# Altium PCB OpenHeat.PcbDoc (part 2 of 2)
Units mm, origin at the board's own origin, x right, y up, seen from the top; angles counter-clockwise.
Board outline 51.05 x 26.04 mm, 2 copper layers (Top1, Bottom4), stack 1.271 mm thick; 76 components, 78 nets, 393 pads, 281 vias.
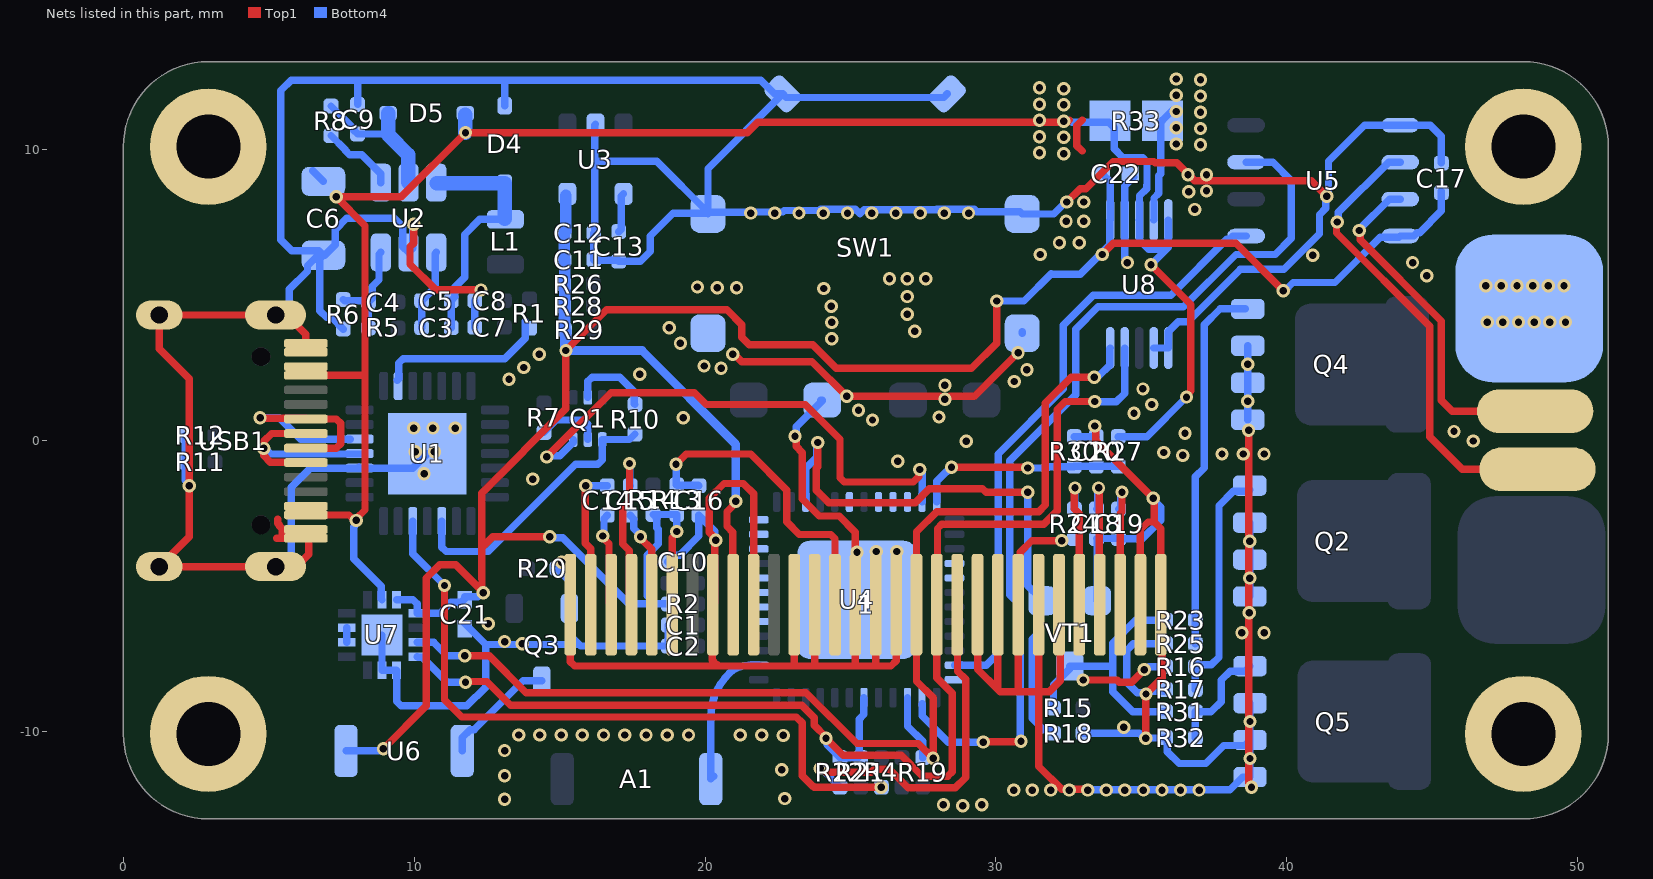
[diagram p2: the nets of this part, all layers, seen from the top]

## Via types
v1: diameter 0.457, hole 0.254, Top1 to Bottom4, tented both sides, 279 vias
v2: diameter 1.6, hole 1.6, Top1 to Bottom4, 2 vias

## Nets (pads, with @x,y where several pads share a name; then routed paths per layer and width w, separated by ;. In a path a pad name is that pad's centre, name@x,y a point inside that pad or via, vN(x,y) a via of type N, cw(c..) or ccw(c..) an arc to the next point about the centre after c; other vN are vias at no path point) (continued)
GND: 1.1 1.8 1.10 1.12 1.13 1.15 1.16 1.17 1.21 1.22 1.23 1.24 1.25 1.29 1.30 C1.1 C2.1 C6.1 C7.1 C8.1 C9.1 C10.2 C11.1 C12.1 C13.1 C16.1 C17.2 C18.2 C19.2 C20.1 C21.1 C22.1 D4.1 pad.@2.921,10.097 pad.@2.921,-10.096 pad.@48.133,10.097 pad.@48.133,-10.096 Q2.S Q3.2 Q4.S Q5.S R6.1 R11.1 R12.2 R17.2 R18.2 R20.1 R24.1 R25.2 R30.2 R32.2 SW1.3 SW1.5 U1.3 U1.29 U2.2 U3.2 U4.49 U5.1 U7.8 U7.9 U7.15 U8.1 U8.2 U8.7 USB1.1 USB1.2 USB1.3 USB1.4 USB1.A1 USB1.A12 USB1.B1 USB1.B12 VT1.2 | length 303.6
  Top1 w0.254: USB1.1@1.234,-4.343 USB1.1@1.332,-4.343 ; 5.266,-3.374 5.351,-3.374 5.357,-3.367 5.436,-3.367 ; 5.309,-2.705 5.309,-2.853 5.359,-2.904 5.359,-2.937 5.467,-3.044 5.467,-3.337 5.436,-3.367 ; USB1.B12@6.274,3.033 USB1.A1@6.274,3.333 6.274,3.645 5.611,4.307 USB1.3@5.234,4.307 USB1.2@1.234,4.307 1.234,3.148 2.261,2.121 v1(2.261,-1.562) 2.261,-3.316 1.677,-3.9 1.677,-3.998 USB1.1@1.332,-4.343 ; v1(9.982,7.429) 9.982,6.78 9.855,6.653 9.855,6.058 10.744,5.169 v1(12.294,5.169) ; 1.1@15.367,-5.651 15.367,-7.611 15.516,-7.76 20.472,-7.76 ; v1(20.955,2.959) 21.01,2.959 21.264,2.705 23.673,2.705 v1(24.867,1.511) 28.088,1.511 28.151,1.449 28.19,1.449 28.245,1.504 28.3,1.449 28.339,1.449 28.401,1.511 29.261,1.511 v1(30.759,3.01) ; 1.10@21.667,-5.651 21.667,-1.844 21.309,-1.486 20.648,-1.486 20.142,-1.992 20.142,-3.158 20.371,-3.387 v1(20.371,-3.442) 20.332,-3.481 20.332,-5.587 1.8@20.267,-5.651 20.244,-5.675 20.244,-7.56 20.393,-7.709 20.422,-7.709 20.472,-7.76 ; 1.12@23.067,-5.651 23.067,-7.731 23.038,-7.76 ; v1(23.089,0.14) 23.127,0.101 23.127,-0.211 23.343,-0.426 23.343,-2.019 23.927,-2.603 24.613,-2.603 25.167,-3.158 1.15@25.167,-5.651 25.167,-7.755 25.171,-7.76 ; 1.13@23.767,-5.651 23.767,-7.752 23.774,-7.76 ; 1.16@25.867,-5.651 25.867,-7.674 25.781,-7.76 ; 1.17@26.567,-5.651 26.568,-5.653 26.568,-7.582 26.391,-7.76 25.781,-7.76 ; 1.21@29.367,-5.651 29.367,-7.866 30.067,-8.566 ; 1.22@30.067,-5.651 30.067,-8.566 ; 1.24@31.467,-5.651 31.467,-8.645 31.471,-8.649 ; 1.25@32.167,-5.651 32.207,-5.692 32.207,-8.268 31.826,-8.649 31.471,-8.649 ; v1(32.258,-3.448) 31.241,-3.448 30.84,-3.848 30.84,-5.579 1.23@30.767,-5.651 30.767,-8.641 30.759,-8.649 ; v1(32.436,8.191) 32.893,8.649 33.096,8.649 34.032,9.585 35.43,9.585 35.469,9.546 36.212,9.546 36.83,8.928 40.843,8.928 v1(41.377,8.395) ; v1@33.16,-12.014 33.147,-12.002 32.258,-12.002 31.471,-11.214 31.471,-8.649 ; v1(33.395,0.492) 33.434,0.453 33.434,-0.02 35.446,-2.033 35.446,-2.8 35.437,-2.81 ; 1.29@34.967,-5.651 34.967,-3.07 35.226,-2.81 35.437,-2.81 ; v1(35.154,-10.249) v1(35.154,-10.249) 35.155,-8.725 v1(35.157,-8.723) ; v1@35.157,-8.674 35.203,-8.674 35.712,-8.165 35.712,-5.697 1.30@35.667,-5.651 35.662,-5.646 35.662,-3.035 35.437,-2.81 ; v1(38.684,0.343) 38.684,-11.769 38.786,-11.87 v1(38.786,-11.925) ; USB1.1@1.332,-4.343 USB1.4@5.234,-4.343 5.957,-4.343 6.375,-3.924 6.375,-3.39 6.352,-3.367 USB1.A12@6.274,-3.367 5.436,-3.367 ; 20.472,-7.76 23.038,-7.76 ; 23.038,-7.76 23.774,-7.76 ; 23.774,-7.76 25.171,-7.76 ; 25.171,-7.76 25.781,-7.76 ; 30.067,-8.566 30.15,-8.649 30.759,-8.649 ; 30.759,-8.649 31.471,-8.649
  Bottom4 w0.254: v1@2.134,-1.38 R11.1@2.134,-0.749 R12.2@2.134,0.165 ; USB1.3@5.234,4.307 5.359,4.307 5.704,4.652 5.704,5.189 6.331,5.816 6.331,5.999 6.695,6.363 C6.1@6.878,6.363 ; USB1.4@5.486,-4.09 USB1.4@5.234,-4.343 5.421,-4.343 5.766,-3.998 5.766,-1.613 6.422,-0.957 U1.3@8.064,-0.957 ; R6.1@7.561,3.823 7.154,4.229 6.985,4.229 6.756,4.458 6.756,6.241 C6.1@6.878,6.363 ; C9.1@8.052,11.544 8.052,12.382 ; U1.3@8.09,-0.932 U1.3@8.064,-0.957 ; U7.15@8.89,-6.693 U7.9@8.89,-7.908 U7.8@9.39,-7.908 9.398,-7.916 9.398,-8.983 9.547,-9.131 11.81,-9.131 12.455,-8.486 12.455,-7.023 ; v1(9.982,7.429) 9.943,7.391 9.943,6.597 U2.2@9.804,6.458 9.611,6.651 9.611,7.343 9.322,7.633 7.671,7.633 7.282,7.244 7.282,6.726 6.918,6.363 C6.1@6.878,6.363 ; U1.29@10.447,-0.457 9.947,-0.957 U1.3@8.123,-0.957 U1.3@8.064,-0.957 ; C21.1@11.709,-6.278 12.455,-7.023 ; C7.1@12.083,3.886 C8.1@12.083,4.8 ; D4.1@13.106,11.502 13.106,12.383 ; R20.1@14.91,-4.407 15.316,-4.813 15.316,-5.758 Q3.2@15.337,-5.779 15.342,-5.784 15.342,-6.693 15.672,-7.023 ; U3.2@16.231,10.858 16.2,10.828 16.2,9.588 ; C10.2@18.72,-4.178 18.948,-3.95 19.126,-3.95 19.787,-3.289 C16.1@19.787,-2.578 20.332,-3.123 20.332,-3.403 v1(20.371,-3.442) ; C1.1@18.732,-6.351 C2.1@18.732,-7.074 15.723,-7.074 15.672,-7.023 ; v1(23.089,0.14) 23.127,0.179 23.127,0.466 24.025,1.363 SW1.3@24.025,1.381 SW1.3@23.975,1.381 ; SW1.5@28.328,11.909 28.205,11.785 22.795,11.785 SW1.5@22.672,11.909 ; SW1.5@30.9,3.681 SW1.5@30.9,3.731 ; v1(32.436,8.191) 32.396,8.191 31.985,7.781 SW1.5@30.9,7.781 30.822,7.859 29.339,7.859 29.261,7.938 27.965,7.938 27.953,7.925 26.708,7.925 26.695,7.912 26.683,7.925 25.468,7.925 25.324,7.781 25.167,7.938 23.978,7.938 23.939,7.899 22.72,7.899 22.668,7.847 21.367,7.847 21.353,7.834 20.153,7.834 SW1.5@20.1,7.781 20.07,7.81 18.898,7.81 18.11,7.023 18.11,6.49 17.78,6.159 C13.1@17.033,6.159 17.007,6.185 16.194,6.185 C11.1@16.169,6.21 C12.1@16.169,7.125 16.2,7.156 16.2,9.588 ; R30.2@32.69,0.127 C20.1@33.449,0.127 33.422,0.154 33.422,0.465 v1(33.395,0.492) ; R18.2@32.995,-10.071 34.921,-10.071 35.099,-10.249 v1(35.154,-10.249) 35.166,-10.236 35.827,-10.236 R32.2@35.839,-10.223 35.89,-10.274 35.89,-10.706 36.297,-11.112 37.211,-11.112 37.829,-10.494 38.547,-10.494 Q5.S@38.734,-10.307 ; v1@33.16,-12.014 38.046,-12.014 38.483,-11.577 Q5.S@38.734,-11.577 Q5.S@38.734,-10.307 ; C18.2@33.455,-3.378 C19.2@34.214,-3.378 34.227,-3.391 35.027,-3.391 35.662,-2.756 35.662,-2.303 35.408,-2.049 v1(35.408,-1.994) ; VT1.2@33.487,-5.517 C18.2@33.487,-3.442 ; v1(34.519,6.109) 34.519,6.164 34.425,6.257 U8.7@34.425,7.572 34.434,7.581 34.434,8.742 C22.1@34.745,9.053 ; v1@35.105,-8.642 35.148,-8.684 35.251,-8.684 35.3,-8.635 35.777,-8.635 R17.2@35.839,-8.572 ; v1(35.157,-8.723) 35.118,-8.684 34.859,-8.684 34.493,-8.319 34.493,-7.226 34.722,-6.998 R25.2@35.839,-6.998 ; U8.2@35.425,3.172 U8.1@35.925,3.172 35.925,3.735 36.267,4.077 36.601,4.077 38.405,5.88 39.903,5.88 41.123,7.099 41.123,7.758 41.338,7.973 41.338,8.356 v1(41.377,8.395) 41.377,8.45 41.434,8.507 41.434,9.595 42.672,10.833 U5.1@43.9,10.833 44.933,10.833 45.314,10.452 C17.2@45.314,9.537 ; Q4.S@38.656,0.706 Q4.S@38.656,1.976 Q4.S@38.656,3.246 ; Q2.S@38.724,-5.372 Q2.S@38.724,-4.102 Q2.S@38.724,-2.832 ; Q5.S@38.734,-10.3 Q5.S@38.734,-10.307 ; Q5.S@38.734,-10.299 Q5.S@38.734,-9.037 ; C6.1@6.878,6.363 6.726,6.515 5.791,6.515 5.41,6.896 5.41,12.027 5.766,12.383 8.052,12.383 13.106,12.383 ; 12.455,-7.023 13.691,-7.023 v1(13.716,-6.998) 13.741,-7.023 15.672,-7.023 ; 13.106,12.383 21.91,12.383 22.384,11.909 SW1.5@22.672,11.909 ; 16.2,9.588 18.342,9.588 20.1,7.83 20.1,9.337 SW1.5@22.672,11.909
  other v1: 28.854,-12.56 28.194,-12.535 29.515,-12.535 13.106,-12.344 22.733,-12.319 30.607,-12.027 31.245,-12.027 31.882,-12.027 32.52,-12.027 33.157,-12.027 33.795,-12.027 34.432,-12.027 35.07,-12.027 35.707,-12.027 36.345,-12.027 36.982,-12.027 13.106,-11.532 22.631,-11.328 38.734,-10.942 13.106,-10.668 13.589,-10.135 14.319,-10.135 15.05,-10.135 15.78,-10.135 16.51,-10.135 17.24,-10.135 17.97,-10.135 18.701,-10.135 19.431,-10.135 21.209,-10.135 21.946,-10.135 22.682,-10.147 34.392,-9.868 38.734,-9.668 13.106,-6.921 38.456,-6.617 39.218,-6.617 12.548,-6.312 38.71,-5.931 38.724,-4.737 15.076,-4.19 25.222,-3.848 25.883,-3.823 26.594,-3.823 38.724,-3.467 14.072,-1.333 10.338,-1.156 26.619,-0.724 36.424,-0.521 37.77,-0.47 38.506,-0.47 39.218,-0.47 35.763,-0.419 10.033,-0.394 10.693,-0.394 28.981,-0.038 46.406,-0.025 36.5,0.241 45.745,0.305 9.982,0.419 10.643,0.419 11.405,0.419 25.756,0.699 19.253,0.775 28.042,0.8 34.747,0.927 25.273,1.029 35.357,1.232 38.656,1.341 28.245,1.41 35.052,1.765 28.245,1.892 30.632,2.019 13.259,2.095 17.755,2.273 31.064,2.426 20.549,2.476 13.767,2.502 19.964,2.553 38.656,2.611 14.3,2.959 19.152,3.34 24.359,3.492 27.203,3.746 18.771,3.873 24.359,4.051 26.949,4.331 24.333,4.61 26.949,4.94 24.079,5.22 20.422,5.245 21.082,5.245 19.736,5.271 26.34,5.55 26.949,5.55 27.584,5.55 44.806,5.651 44.323,6.109 40.894,6.363 31.521,6.388 32.182,6.794 32.868,6.794 32.41,7.531 33.02,7.531 21.565,7.81 22.397,7.81 23.23,7.81 24.062,7.81 24.895,7.81 25.727,7.81 26.56,7.81 27.392,7.81 28.225,7.81 29.058,7.81 36.83,7.938 33.02,8.191 36.627,8.547 37.236,8.572 36.601,9.131 37.236,9.131
GPIO0: Q1.3 U4.23 | length 18.5
  Top1 w0.254: v1(14.554,-0.572) 16.764,1.638 19.634,1.638 20.041,1.232 23.444,1.232 24.638,0.038 24.638,-1.286 24.787,-1.435 27.161,-1.435 27.342,-1.254 27.342,-1.042 v1(27.381,-1.003)
  Bottom4 w0.254: v1(14.554,-0.572) 14.593,-0.533 15.004,-0.533 15.465,-0.071 Q1.3@15.465,0.026 ; v1(27.381,-1.003) 27.381,-1.058 27.46,-1.137 U4.23@27.46,-2.121
GPIO2: U4.22
GPIO4: C20.2 R27.2 R30.1 U4.24 | length 7.2
  Top1 w0.254: v1(28.469,-0.927) 31.064,-0.927 v1(31.09,-0.953)
  Bottom4 w0.254: U4.24@27.96,-2.121 27.962,-2.119 27.962,-1.413 28.296,-1.079 28.317,-1.079 v1(28.469,-0.927) ; v1(31.09,-0.953) 31.782,-0.953 31.826,-0.908 32.671,-0.908 R30.1@32.69,-0.889 C20.2@33.449,-0.889 R27.2@34.207,-0.889
GPIO9: U4.28
GPIO10: U4.29
GPIO12: U4.18
GPIO13: U4.20
GPIO15: U4.21
GPIO18: U4.35 U5.5 | length 21.4
  Bottom4 w0.254: U4.35@28.573,-7.733 29.668,-7.733 30.074,-7.328 30.074,-0.47 32.309,1.765 32.309,3.959 33.341,4.991 36.017,4.991 37.932,6.906 38.016,6.906 38.133,7.023 U5.5@38.6,7.023
GPIO19: U4.38 U5.7 | length 32
  Top1 w0.254: v1(29.566,-10.376) 29.578,-10.363 30.848,-10.363 v1(30.861,-10.351)
  Bottom4 w0.254: U4.38@27.462,-9.056 27.462,-9.479 28.359,-10.376 v1(29.566,-10.376) ; v1(30.861,-10.351) 30.833,-10.322 30.833,-5.66 30.48,-5.307 30.48,-0.7 32.741,1.561 32.741,3.816 33.509,4.585 36.449,4.585 38.252,6.388 39.599,6.388 40.157,6.947 40.157,8.928 39.522,9.563 U5.7@38.6,9.563
GPIO21: 1.19 R21.2 R22.2 U4.42 U7.7 U8.4 | length 44.5
  Top1 w0.254: v1(11.76,-8.319) 11.786,-8.293 12.497,-8.293 13.31,-9.106 23.317,-9.106 23.749,-9.538 23.749,-9.793 24.155,-10.2 v1(24.155,-10.249) 24.74,-10.833 26.746,-10.833 27.457,-11.544 28.35,-11.544 28.499,-11.396 28.499,-8.7 27.965,-8.166 27.965,-5.653 27.991,-5.628 27.991,-3.032 28.14,-2.883 31.648,-2.883 32.106,-2.426 32.106,1.058 32.381,1.333 v1(33.401,1.333)
  Bottom4 w0.254: U7.7@10.105,-7.443 10.128,-7.466 10.278,-7.466 11.131,-8.319 v1(11.76,-8.319) ; v1(24.155,-10.249) 24.194,-10.288 24.194,-10.466 R22.2@24.638,-10.909 25.248,-10.909 25.298,-10.858 25.298,-9.59 25.46,-9.428 U4.42@25.46,-8.846 ; v1(33.401,1.333) 33.416,1.319 34.138,1.319 34.425,1.606 U8.4@34.425,3.172
GPIO22: 1.18 R19.2 U4.39 U7.6 U8.5 | length 41.4
  Top1 w0.254: v1(11.735,-7.404) 12.573,-7.404 13.843,-8.674 23.47,-8.674 25.222,-10.427 27.33,-10.427 v1(27.838,-10.935) 27.838,-8.852 27.267,-8.28 1.18@27.267,-5.651 27.267,-3.15 27.965,-2.451 31.474,-2.451 31.699,-2.226 31.699,1.283 32.588,2.172 v1(33.376,2.172)
  Bottom4 w0.254: U7.6@10.105,-6.943 10.664,-6.943 11.125,-7.404 v1(11.735,-7.404) ; U4.39@26.96,-8.846 26.96,-9.828 27.483,-10.351 R19.2@27.483,-10.909 ; v1(33.376,2.172) 33.414,2.211 33.538,2.211 33.91,2.582 33.91,3.157 U8.5@33.925,3.172
GPIO23: U4.36
GPIO26: R18.1 U4.15 VT1.1 | length 20.6
  Top1 w0.254: v1(23.872,-0.076) 23.872,-0.919 23.825,-0.966 23.825,-1.714 24.257,-2.146 27.229,-2.146 27.711,-1.664 29.535,-1.664 29.662,-1.791 v1(31.09,-1.791)
  Bottom4 w0.254: U4.15@23.46,-2.121 23.46,-0.962 23.833,-0.589 23.833,-0.115 v1(23.872,-0.076) ; v1(31.09,-1.791) 31.09,-4.995 31.496,-5.402 31.496,-6.591 31.242,-6.845 31.242,-9.563 31.632,-9.953 31.861,-9.953 R18.1@31.979,-10.071
GPIO32: U4.12
GPIO34: U4.10
GPIO35: U4.11
GPIO37: U4.6
GPIO38: U4.7
Net1_2: 1.2 C14.1 | length 4.9
  Top1 w0.254: v1(15.9,-1.562) 15.875,-1.587 15.875,-3.542 16.065,-3.732 16.065,-5.649 1.2@16.067,-5.651
  Bottom4 w0.254: v1(15.9,-1.562) C14.1@16.637,-1.562
Net1_3: 1.3 C14.2 | length 3.3
  Top1 w0.254: v1(16.485,-3.289) 16.485,-3.344 16.694,-3.554 16.694,-5.579 1.3@16.767,-5.651
  Bottom4 w0.254: v1(16.485,-3.289) 16.523,-3.25 16.523,-2.692 C14.2@16.637,-2.578
Net1_4: 1.4 C15.1 | length 5.8
  Top1 w0.254: v1(17.399,-0.8) 17.399,-2.097 17.17,-2.325 17.17,-3.567 17.394,-3.791 17.394,-5.579 1.4@17.467,-5.651
  Bottom4 w0.254: v1(17.399,-0.8) 17.412,-0.813 17.412,-1.549 C15.1@17.424,-1.562
Net1_5: 1.5 C15.2 | length 3.4
  Top1 w0.254: v1(17.78,-3.315) 17.78,-3.37 18.161,-3.751 18.161,-5.646 1.5@18.167,-5.651
  Bottom4 w0.254: C15.2@17.424,-2.578 17.551,-2.705 17.551,-3.031 17.78,-3.26 v1(17.78,-3.315)
Net1_20: 1.20 R22.1 | length 12.5
  Top1 w0.254: v1(23.953,-11.281) 24.006,-11.281 24.142,-11.417 25.706,-11.417 25.808,-11.316 26.34,-11.316 26.975,-11.951 28.6,-11.951 28.956,-11.595 28.956,-8.217 28.677,-7.938 28.677,-5.661 1.20@28.667,-5.651
  Bottom4 w0.254: v1(23.953,-11.281) 23.994,-11.281 R22.1@24.638,-11.925
Net1_26: 1.26 R24.2 | length 4.8
  Top1 w0.254: v1(32.715,-1.638) 32.69,-1.664 32.69,-2.349 32.868,-2.527 1.26@32.868,-5.651
  Bottom4 w0.254: R24.2@32.696,-2.362 32.706,-2.353 32.706,-1.648 v1(32.715,-1.638)
Net1_27: 1.27 C18.1 | length 4.8
  Top1 w0.254: v1(33.528,-1.638) 33.547,-1.658 33.547,-5.632 1.27@33.567,-5.651
  Bottom4 w0.254: C18.1@33.455,-2.362 33.491,-2.326 33.491,-1.675 v1(33.528,-1.638)
Net1_28: 1.28 C19.1 | length 4.5
  Top1 w0.254: 1.28@34.267,-5.651 34.267,-2.518 34.333,-2.452 v1(34.333,-1.781)
  Bottom4 w0.254: C19.1@34.214,-2.362 34.294,-2.282 34.294,-1.82 v1(34.333,-1.781)
NetA1_1: A1.1 U4.2 | length 5
  Bottom4 w0.254: A1.1@20.295,-11.544 A1.1@20.193,-11.646 20.193,-9.547 cw(c22.361,-9.547) 20.828,-8.014 cw(c21.505,-8.69) 21.505,-7.733 U4.2@21.848,-7.733
NetC3_1: C3.1 C5.1 D4.2 L1.1 U2.6 | length 8.6
  Bottom4 w0.254: U2.6@10.754,8.858 U2.6@10.769,8.843 ; C3.1@11.27,3.873 C5.1@11.27,4.801 11.397,4.928 11.397,5.262 11.735,5.601 11.735,7.074 12.255,7.594 L1.1@13.132,7.594 L1.1@13.106,7.619
  Bottom4 w0.5: U2.6@10.769,8.843 D4.2@13.106,8.843 L1.1@13.106,7.619
NetC3_2: C3.2 C5.2 U2.1 | length 2.8
  Bottom4 w0.254: C3.2@10.254,3.873 C5.2@10.254,4.801 10.719,5.266 10.719,6.422 U2.1@10.754,6.458
NetC4_2: C4.2 R5.1 R6.2 U2.3 | length 3.7
  Bottom4 w0.254: R6.2@7.561,4.839 7.605,4.794 8.38,4.794 C4.2@8.424,4.75 ; R5.1@8.424,3.861 C4.2@8.424,4.75 ; U2.3@8.854,6.458 8.788,6.392 8.788,5.524 8.551,5.288 8.551,4.877 C4.2@8.424,4.75
NetC9_2: C9.2 D5.2 R8.1 U2.5 | length 5.1
  Bottom4 w0.254: R8.1@7.137,11.493 7.925,10.706 7.925,10.655 C9.2@8.052,10.528 9.075,10.528 9.101,10.502
  Bottom4 w0.5: D5.2@9.101,11.239 9.101,10.502 9.796,9.808 9.796,8.867 U2.5@9.804,8.858
NetC13_2: C13.2 U3.4 | length 1.4
  Bottom4 w0.254: C13.2@17.033,7.175 17.114,7.257 17.114,8.389 U3.4@17.196,8.471
NetQ1_2: Q1.2 R7.2 | length 2.3
  Bottom4 w0.254: R7.2@14.458,0.267 14.89,0.699 15.817,0.699 15.965,0.55 Q1.2@15.965,0.026
NetQ1_5: Q1.5 R10.2 | length 2.9
  Bottom4 w0.254: Q1.5@15.965,1.472 15.965,2.023 16.114,2.172 17.069,2.172 17.568,1.673 17.568,1.255 R10.2@17.591,1.232
NetQ2_G: Q2.G R16.1 R17.1 | length 8.2
  Bottom4 w0.254: R17.1@36.855,-8.572 R16.1@36.855,-7.785 36.92,-7.721 37.402,-7.721 37.668,-7.455 37.668,-2.248 38.161,-1.755 38.673,-1.755 Q2.G@38.721,-1.707
NetQ3_3: Q3.3 U6.2 | length 4
  Bottom4 w0.254: U6.2@11.652,-10.681 11.652,-10.22 11.919,-9.953 12.056,-9.953 13.739,-8.27 Q3.3@14.387,-8.27
NetQ4_G: Q4.G R23.1 R25.1 | length 12.7
  Bottom4 w0.254: R25.1@36.855,-6.998 36.855,-1.257 37.16,-0.952 37.16,3.975 37.701,4.516 Q4.G@38.568,4.516
NetQ5_G: Q5.G R31.1 R32.1 | length 3.9
  Bottom4 w0.254: R32.1@36.855,-10.223 R31.1@36.855,-9.335 37.394,-9.335 37.744,-8.984 37.744,-8.242 38.051,-7.936 38.565,-7.936 Q5.G@38.734,-7.767
NetR1_2: R1.2 U1.9 | length 5.9
  Bottom4 w0.254: U1.9@9.414,2.057 9.473,2.116 9.473,2.658 9.622,2.807 13.106,2.807 13.81,3.51 13.81,3.848 13.81,4.102
NetR4_2: R4.2 U1.26 | length 24
  Top1 w0.254: v1(11.041,-4.991) 11.041,-8.92 11.633,-9.512 23.139,-9.512 23.343,-9.716 23.343,-11.519 23.345,-11.521 23.345,-11.537 23.698,-11.891 23.714,-11.891 23.749,-11.925 v1@26.129,-11.925
  Bottom4 w0.254: U1.26@9.947,-2.781 9.947,-3.898 v1(11.041,-4.991)
  other v1: 26.06,-11.925
NetR8_2: R8.2 U2.4 | length 2.6
  Bottom4 w0.254: R8.2@7.137,10.477 7.624,9.991 7.624,9.966 7.772,9.817 8.195,9.817 8.854,9.158 U2.4@8.854,8.858
NetR15_1: R15.1 R16.2 R23.2 R31.2 VT1.3 | length 12.2
  Top1 w0.254: v1(32.995,-8.242) 34.163,-8.242 34.239,-8.319 34.668,-8.319 v1(35.103,-7.884)
  Bottom4 w0.254: R15.1@31.979,-9.207 31.979,-8.411 32.537,-7.852 VT1.3@32.537,-7.767 34.011,-7.767 ; v1(35.103,-7.884) 35.158,-7.884 35.257,-7.785 R16.2@35.839,-7.785 ; R31.2@35.839,-9.335 34.696,-9.335 34.011,-8.649 34.011,-7.767 ; R23.2@35.839,-6.185 34.798,-6.185 34.011,-6.972 34.011,-7.767
NetU7_12: U7.12 U7.13 | length 0.5
  Bottom4 w0.254: U7.12@7.675,-6.943 U7.13@7.675,-6.443
OLED_RST: 1.14 C16.2 R13.1 | length 11.2
  Top1 w0.254: v1(18.999,-0.826) 19.355,-0.47 21.565,-0.47 22.809,-1.714 22.809,-2.807 23.241,-3.238 24.318,-3.238 24.467,-3.387 1.14@24.467,-5.651
  Bottom4 w0.254: v1(18.999,-0.826) 19.012,-0.838 19.012,-1.524 R13.1@19.025,-1.537 19.037,-1.549 19.774,-1.549 C16.2@19.787,-1.562
RTS: Q1.1 R10.1 U1.24 | length 9.7
  Bottom4 w0.254: U1.24@10.947,-2.781 10.947,-3.674 11.096,-3.823 12.548,-3.823 15.545,-0.826 16.31,-0.826 16.459,-0.677 16.459,0.02 Q1.1@16.465,0.026 17.402,0.026 R10.1@17.591,0.216
SENSOR_VN: U4.8
SENSOR_VP: U4.5
TIN_N: pad.2 U5.2 | length 16.1
  Top1 w0.254: v1(41.732,7.506) 41.707,7.48 41.707,7.125 44.907,3.924 44.907,0.127 46.034,-1 pad.2@48.616,-1
  Bottom4 w0.254: v1(41.732,7.506) 41.771,7.545 41.771,7.835 43.5,9.563 U5.2@43.9,9.563
TIN_P: pad.3 U5.3 | length 12.3
  Top1 w0.254: v1(42.491,7.214) 42.523,7.181 42.523,6.892 45.314,4.102 45.314,1.372 45.685,1 pad.3@48.539,1
  Bottom4 w0.254: v1(42.491,7.214) 42.491,7.249 43.535,8.293 U5.3@43.9,8.293
USB-PWR-DM: U1.5 USB1.A7 USB1.B7 | length 8.2
  Top1 w0.254: v1(4.699,0.775) 4.72,0.754 6.253,0.754 USB1.B7@6.274,0.733 7.319,0.733 7.468,0.584 7.468,-0.119 7.319,-0.267 USB1.A7@6.274,-0.267
  Bottom4 w0.254: v1(4.699,0.775) 5.359,0.775 6.096,0.038 U1.5@7.803,0.038
USB-PWR-DP: U1.4 USB1.A6 USB1.B6 | length 7
  Top1 w0.254: USB1.B6@6.274,-0.767 6.256,-0.749 5.055,-0.749 4.826,-0.521 v1(4.826,-0.279) 4.826,-0.038 5.097,0.233 USB1.A6@6.274,0.233
  Bottom4 w0.254: v1(4.826,-0.279) 4.881,-0.279 5.071,-0.47 U1.4@8.185,-0.47
VCC_3V3: 1.6 1.9 C11.2 C12.2 C17.1 C21.2 C22.2 R2.1 R13.2 R14.1 R26.2 R28.2 R29.2 U3.5 U5.4 U6.1 U7.3 U7.4 U8.6 | length 96.3
  Top1 w0.254: v1(8.941,-10.604) 10.414,-9.131 10.414,-4.737 10.871,-4.28 11.43,-4.28 12.37,-5.22 v1(12.37,-5.245) ; v1@12.331,-5.151 12.331,-4.773 12.319,-4.761 12.319,-3.696 ; v1(14.656,-3.315) 12.7,-3.315 12.319,-3.696 ; 1.6@18.867,-5.651 18.867,-3.349 ; 1.9@20.967,-5.651 20.953,-5.638 20.953,-3.161 20.752,-2.959 20.752,-2.455 21.057,-2.15 v1(21.057,-2.095) ; v1(30.023,4.788) 30.023,3.34 29.159,2.476 24.512,2.476 23.7,3.289 21.514,3.289 21.26,3.543 21.26,3.975 20.752,4.483 16.612,4.483 v1(15.215,3.086) 15.215,1.079 12.319,-1.816 12.319,-3.696 ; v1(33.655,6.388) 34.036,6.769 38.252,6.769 v1(39.878,5.143)
  Bottom4 w0.254: U6.1@7.652,-10.681 8.81,-10.681 8.886,-10.604 v1(8.941,-10.604) ; U7.3@9.39,-5.478 9.956,-5.478 10.105,-5.627 U7.4@10.105,-5.943 10.885,-5.943 11.253,-5.575 11.612,-5.575 11.735,-5.452 11.735,-5.374 12.186,-5.374 12.315,-5.245 v1(12.37,-5.245) ; v1(14.656,-3.315) 14.695,-3.354 15.101,-3.354 17.374,-5.626 18.288,-5.626 ; C11.2@15.153,6.21 C11.2@15.171,6.192 ; C12.2@15.153,7.125 C12.2@15.209,7.181 ; R28.2@15.164,4.483 R28.2@15.171,4.483 ; U3.5@15.209,8.415 U3.5@15.265,8.471 ; R2.1@18.732,-5.629 18.73,-5.626 18.288,-5.626 ; v1(19.025,-3.137) R13.2@19.025,-2.553 R14.1@18.212,-2.553 18.339,-2.68 18.339,-3.011 18.39,-3.062 18.39,-3.567 18.009,-3.948 18.009,-5.347 18.288,-5.626 ; v1(30.023,4.788) 30.963,4.788 31.902,5.728 ; 31.902,5.702 32.893,5.702 33.916,6.726 33.916,7.563 U8.6@33.925,7.572 33.925,8.894 33.662,9.157 C22.2@33.612,9.157 ; v1(39.878,5.143) 39.933,5.143 40.212,5.423 41.656,5.423 43.209,6.976 43.853,6.976 U5.4@43.9,7.023 44.366,7.023 44.483,7.14 44.567,7.14 45.314,7.887 C17.1@45.314,8.556
  Bottom4 w0.3: v1@15.313,3.086 17.831,3.086 21.057,-0.14 v1(21.057,-2.095)
  Bottom4 w0.4: C11.2@15.153,6.21 C12.2@15.153,7.125 ; R28.2@15.164,4.483 R29.2@15.164,3.797 15.215,3.746 v1(15.215,3.086) ; R28.2@15.171,4.483 C11.2@15.171,6.192 ; C12.2@15.209,7.181 U3.5@15.209,8.415
VOUT: pad.@48.336,4.534 R33.2 U8.9 | length 4
  Bottom4 w0.254: U8.9@35.425,7.572 35.434,7.581 35.434,8.329 35.597,8.492 35.597,8.621 35.598,8.623 35.598,9.093 35.662,9.157 35.662,10.924 R33.2@35.723,10.985 35.723,10.997 R33.2@36.068,11.341
  other v1: 46.888,4.064 47.427,4.064 47.965,4.064 48.504,4.064 49.042,4.064 49.581,4.064 46.838,5.309 47.376,5.309 47.915,5.309 48.453,5.309 48.992,5.309 49.53,5.309 37.033,10.16 36.195,10.185 37.033,10.719 36.195,10.744 37.033,11.278 36.195,11.303 37.033,11.836 36.195,11.862 37.033,12.395 36.195,12.421
VUSB: C6.2 D5.1 R27.1 R33.1 U7.2 U8.8 U8.10 USB1.A4 USB1.A9 USB1.B4 USB1.B9 | length 64.9
  Top1 w0.254: USB1.A9@6.274,-2.567 7.758,-2.567 7.946,-2.756 v1(8.001,-2.756) 8.001,-2.701 8.306,-2.396 8.306,2.248 ; USB1.B9@6.274,2.233 8.29,2.233 8.306,2.248 ; v1@31.648,10.935 21.809,10.935 21.453,10.579 v1(11.76,10.579) 9.55,8.369 v1(7.315,8.369) 8.306,7.379 8.306,2.248 ; 31.725,10.935 32.453,10.935 v1@32.529,11.011 ; 32.969,9.944 32.782,10.132 32.782,10.823 32.969,11.011 ; v1(35.331,6.032) 36.703,4.661 36.703,1.693 36.551,1.541 v1(36.551,1.486)
  Bottom4 w0.254: C6.2@6.505,9.266 6.869,8.903 C6.2@6.878,8.903 ; v1(8.001,-2.756) 7.962,-2.795 7.962,-2.938 7.925,-2.976 7.925,-4.077 8.868,-5.019 8.868,-5.455 U7.2@8.89,-5.478 ; 32.614,10.935 33.873,10.935 34.061,10.746 34.061,10.02 34.366,9.716 35.043,9.716 35.192,9.567 35.192,8.791 35.179,8.778 35.179,8.649 34.934,8.403 34.934,7.581 U8.8@34.925,7.572 34.934,7.563 34.934,6.881 35.247,6.568 35.603,6.568 U8.10@35.916,6.881 ; R27.1@34.207,0.127 35.192,0.127 v1(36.551,1.486) ; v1(35.331,6.032) 35.925,6.626 U8.10@35.925,7.572 ; D5.1@11.71,11.239 11.76,11.19 D5.1@11.76,11.239 D5.1@11.71,11.239
  Bottom4 w0.5: v1(11.76,10.579) D5.1@11.76,11.19
  other v1: 32.334,9.855 31.496,9.881 32.334,10.414 31.496,10.439 32.334,10.973 31.496,10.998 32.334,11.532 31.496,11.557 32.334,12.09 31.496,12.116
pads on no net: 1.7 A1. Q2.7 Q2.9 Q2.10 Q2.11 Q4.7 Q4.9 Q4.10 Q4.11 Q5.7 Q5.9 Q5.10 Q5.11 U1.1 U1.2 U1.6 U1.10 U1.11 U1.12 U1.13 U1.14 U1.15 U1.16 U1.17 U1.18 U1.19 U1.20 U1.21 U1.22 U1.23 U1.27 U4.26 U4.44 U4.45 U4.47 U4.48 U5.8 U7.5 USB1.0 USB1.A8 USB1.B8
copper on no net:
  other v2: 22.5,4.58 28.5,4.58

## Polygon pours and split planes (outlines as drawn)
GND on Top1 "GND_L01_P007" (solid, pour order 7): 0.025,12.91 51.079,13.24 51.079,-13.106 0.025,-13.106
VUSB on Top1 "VUSB_L01_P000" (solid, pour order 0): 6.401,-2.146 7.366,-2.146 7.874,-1.638 7.874,2.121 6.477,2.121 6.553,2.197 6.553,2.654 7.747,2.654 7.823,2.73 7.823,4.576 6.833,5.567 6.833,9.461 7.214,9.842 9.042,9.842 9.855,10.579 11.76,12.484 32.893,12.484 33.299,12.078 33.299,9.614 32.817,9.131 12.573,9.131 12.522,9.131 11.278,7.938 9.576,7.938 9.473,7.835 9.473,-1.93 8.585,-2.691 6.401,-2.691
VOUT on Top1 "VOUT_L01_P003" (solid, pour order 3): 35.585,12.636 35.585,10.147 35.865,9.868 41.427,9.868 46.101,5.194 46.101,3.416 46.863,2.654 49.904,2.654 50.775,3.637 50.724,6.489 50.013,7.201 47.447,7.201 42.012,12.636
GND on Top1 "GND_L01_P006" (solid, pour order 6): 37.694,-11.57 38.278,-12.154 39.37,-12.154 39.37,-12.103 39.827,-11.646 39.802,-11.62 39.802,3.315 39.472,3.645 37.795,3.645 37.44,3.289 37.44,-11.341 37.592,-11.493
GND on Bottom4 "GND_L02_P008" (solid, remove dead copper, pour order 8): 0.167,11.457 1.765,13.056 51.118,13.056 51.118,-13.056 51.168,-13.106 0.191,-13.106
VOUT on Bottom4 "VOUT_L02_P004" (solid, pour order 4): 35.585,10.274 35.662,10.274 36.017,9.919 37.541,9.919 37.541,12.662 37.49,12.713 35.763,12.713 35.585,12.535
VUSB on Bottom4 "VUSB_L02_P002" (solid, pour order 2): 34.315,11.722 33.35,11.722 33.35,12.027 32.842,12.535 31.09,12.535 30.988,12.433 30.988,9.588 31.242,9.335 32.868,9.335 33.35,9.817 33.35,10.249 34.29,10.249 34.315,10.274
BED_OUT on Bottom4 "BED_OUT_L02_P001" (solid, pour order 1): 40.665,-11.57 40.386,-11.29 40.386,4.508 44.653,4.508 44.704,4.559 44.831,4.432 44.831,-1.918 49.733,-1.918 50.597,-2.781 50.597,-5.702 49.403,-6.896 44.806,-6.896 44.806,-11.011 44.78,-11.011 44.145,-11.646

## Keep-outs
Keep-Out Layer:
  lines w0.254: 51.054,-7.506 51.054,10.096 ccw(c48.133,10.096) 48.133,13.018 2.921,13.018 ccw(c2.921,10.096) 0,10.096 0,-10.096 ccw(c2.921,-10.096) 2.921,-13.018 48.133,-13.018 ccw(c48.133,-10.096) 51.054,-10.096 51.054,-7.404

## Other copper
Top1:
  pour cut-out: 22.301,-10.325 22.301,-12.992 13.36,-12.992 13.36,-10.325
Bottom4:
  pour cut-out: 22.276,-10.274 22.276,-12.941 13.386,-12.941 13.386,-10.274

## Silkscreen, mask and mechanical layers (free items; w line width, h text height)
Top Overlay:
  text "+" at 49.226,1.509 h2.54
  text "Temp" at 45.695,-1.575 h1.4 r90
  text "-" at 49.353,-3.798 h2.54
  text "V1.0" at 46.19,-5.206 h1.2 r90
  text "USBPower" at 44.936,-11.176 h2 r90
Top Solder:
  rectangle: 13.335,-12.992 22.301,-10.325
Bottom Solder:
  rectangle: 13.36,-12.916 22.301,-10.249
Mechanical 1:
  the board outline again, w0.254
Drill Drawing:
  circle w0.254: c2.734,32.963 r0.847
  lines w0.254: 1.887,28.307 1.887,28.73 2.31,29.153 1.887,29.577 1.887,30 2.31,30 2.734,29.577 3.157,30 3.58,30 3.58,29.577 3.157,29.153 3.58,28.73 3.58,28.307 3.157,28.307 2.734,28.73 2.31,28.307 1.887,28.307 ; 1.887,36.35 2.31,36.35 2.31,35.927 3.157,35.927 3.157,36.35 3.58,36.35 3.58,37.197 3.157,37.197 3.157,37.62 2.31,37.62 2.31,37.197 1.887,37.197 1.887,36.35 ; 1.887,39.737 2.734,40.16 3.58,39.737 3.157,40.583 3.58,41.43 2.734,41.007 1.887,41.43 2.31,40.583 1.887,39.737 ; 1.887,45.24 3.58,45.24 2.734,43.547 1.887,45.24 ; 1.887,47.78 2.31,47.78 2.734,47.357 3.157,47.78 3.58,47.78 3.157,48.203 3.58,48.627 3.157,48.627 2.734,49.05 2.31,48.627 1.887,48.627 2.31,48.203 1.887,47.78
  lines w0.381: 0.368,27.164 335.859,27.164 ; 0.368,50.024 335.859,50.024 ; 14.361,23.354 14.361,53.834 ; 29.343,23.354 29.343,53.834 ; 57.274,23.354 57.274,53.834 ; 70.124,23.354 70.124,53.834 ; 88.762,23.354 88.762,53.834 ; 118.98,23.354 118.98,53.834 ; 133.962,23.354 133.962,53.834 ; 152.905,23.354 152.905,53.834 ; 183.122,23.354 183.122,53.834 ; 204.808,23.354 204.808,53.834 ; 238.681,23.354 238.681,53.834 ; 272.555,23.354 272.555,53.834 ; 300.233,23.354 300.233,53.834 ; 0.368,23.354 335.859,23.354 335.859,53.834 0.368,53.834 0.368,23.354
  text "Symbol" at 2.654,51.167 h1.83
  text "Count" at 15.504,51.167 h1.83
  text "Hole Size" at 30.486,51.167 h1.83
  text "Plated" at 58.417,51.167 h1.83
  text "Hole Type" at 71.267,51.167 h1.83
  text "Drill Layer Pair" at 89.905,51.167 h1.83
  text "Via/Pad" at 120.123,51.167 h1.83
  text "Pad Shape" at 135.105,51.167 h1.83
  text "Template" at 154.048,51.167 h1.83
  text "Description" at 184.265,51.167 h1.83
  text "Hole Tolerance (+)" at 205.951,51.167 h1.83
  text "Hole Tolerance (-)" at 239.824,51.167 h1.83
  text "Hole Length" at 273.698,51.167 h1.83
  text "Routed Path Length" at 301.376,51.167 h1.83
  text "2" at 15.504,47.357 h1.52
  text "23.62mil (0.600mm)" at 30.486,47.357 h1.52
  text "PTH" at 58.417,47.357 h1.52
  text "Slot" at 71.267,47.357 h1.52
  text "Top1 - Bottom4" at 89.905,47.357 h1.52
  text "Pad" at 120.123,47.357 h1.52
  text "Rounded" at 135.105,47.357 h1.52
  text "r160_100h60_120r100" at 154.048,47.357 h1.52
  text "47.24mil (1.200mm)" at 273.698,47.357 h1.52
  text "23.62mil (0.600mm)" at 301.376,47.357 h1.52
  text "2" at 15.504,43.547 h1.52
  text "23.62mil (0.600mm)" at 30.486,43.547 h1.52
  text "PTH" at 58.417,43.547 h1.52
  text "Slot" at 71.267,43.547 h1.52
  text "Top1 - Bottom4" at 89.905,43.547 h1.52
  text "Pad" at 120.123,43.547 h1.52
  text "Rounded" at 135.105,43.547 h1.52
  text "r210_100h60_170r100" at 154.048,43.547 h1.52
  text "66.93mil (1.700mm)" at 273.698,43.547 h1.52
  text "43.31mil (1.100mm)" at 301.376,43.547 h1.52
  text "2" at 15.504,39.737 h1.52
  text "25.59mil (0.650mm)" at 30.486,39.737 h1.52
  text "PTH" at 58.417,39.737 h1.52
  text "Round" at 71.267,39.737 h1.52
  text "Top1 - Bottom4" at 89.905,39.737 h1.52
  text "Pad" at 120.123,39.737 h1.52
  text "Rounded" at 135.105,39.737 h1.52
  text "c65h65" at 154.048,39.737 h1.52
  text "-" at 273.698,39.737 h1.52
  text "-" at 301.376,39.737 h1.52
  text "2" at 15.504,35.927 h1.52
  text "62.99mil (1.600mm)" at 30.486,35.927 h1.52
  text "PTH" at 58.417,35.927 h1.52
  text "Round" at 71.267,35.927 h1.52
  text "Top1 - Bottom4" at 89.905,35.927 h1.52
  text "Via" at 120.123,35.927 h1.52
  text "Rounded" at 135.105,35.927 h1.52
  text "v160h160" at 154.048,35.927 h1.52
  text "-" at 273.698,35.927 h1.52
  text "-" at 301.376,35.927 h1.52
  text "4" at 15.504,32.117 h1.52
  text "86.61mil (2.200mm)" at 30.486,32.117 h1.52
  text "PTH" at 58.417,32.117 h1.52
  text "Round" at 71.267,32.117 h1.52
  text "Top1 - Bottom4" at 89.905,32.117 h1.52
  text "Pad" at 120.123,32.117 h1.52
  text "Rounded" at 135.105,32.117 h1.52
  text "c400h220" at 154.048,32.117 h1.52
  text "-" at 273.698,32.117 h1.52
  text "-" at 301.376,32.117 h1.52
  text "279" at 15.504,28.307 h1.52
  text "10.00mil (0.254mm)" at 30.486,28.307 h1.52
  text "PTH" at 58.417,28.307 h1.52
  text "Round" at 71.267,28.307 h1.52
  text "Top1 - Bottom4" at 89.905,28.307 h1.52
  text "Via" at 120.123,28.307 h1.52
  text "Rounded" at 135.105,28.307 h1.52
  text "v46h25m0mx0" at 154.048,28.307 h1.52
  text "-" at 273.698,28.307 h1.52
  text "-" at 301.376,28.307 h1.52
  text "291 Total" at 15.504,24.497 h1.52
  text "Slot definitions :" at 2.654,20.814 h1.52
  text "Routed Path Length" at 28.885,20.814 h1.52
  text "= Calculated from tool start centre position to tool end centre position." at 56.892,20.814 h1.52
  text "Hole Length" at 28.885,18.275 h1.52
  text "= Routed Path Length + Tool Size = Slot length as defined in the PCB layout" at 46.482,18.275 h1.52